# Altium PCB FE1.1S_PCB.PcbDoc
Units mil, origin at the board's own origin, x right, y up, seen from the top; angles counter-clockwise.
Board outline not stored, 4 copper layers (Top Layer, Internal Plane 1, Mid-Layer 1, Bottom Layer), stack 18.2 mil thick; 15 components, 0 nets, 58 pads, 24 vias.
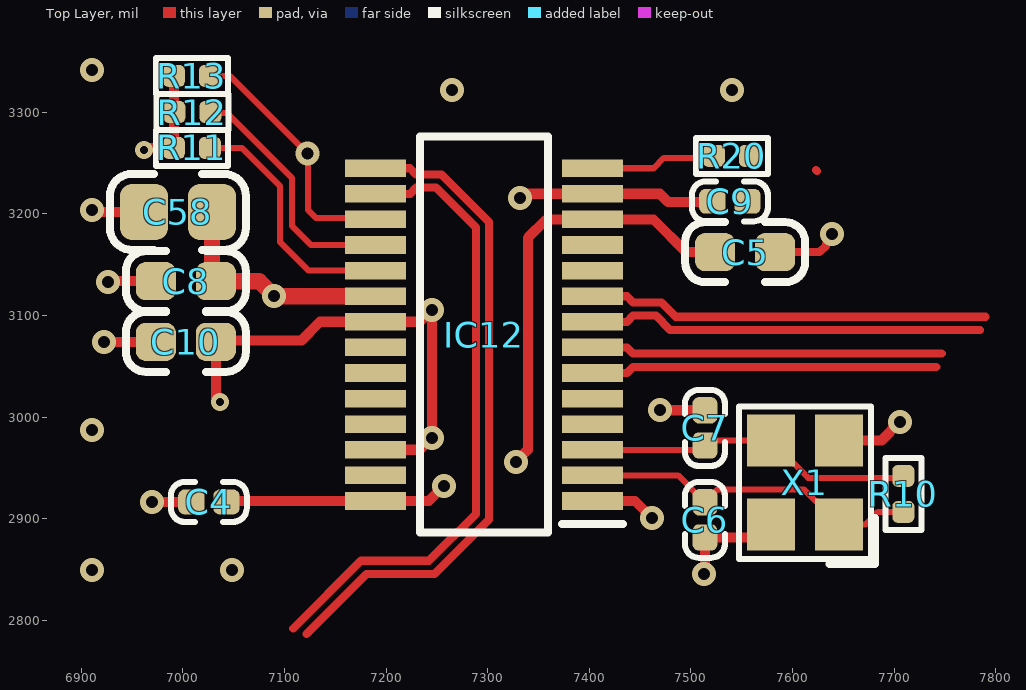
[diagram p0: Top Layer view]
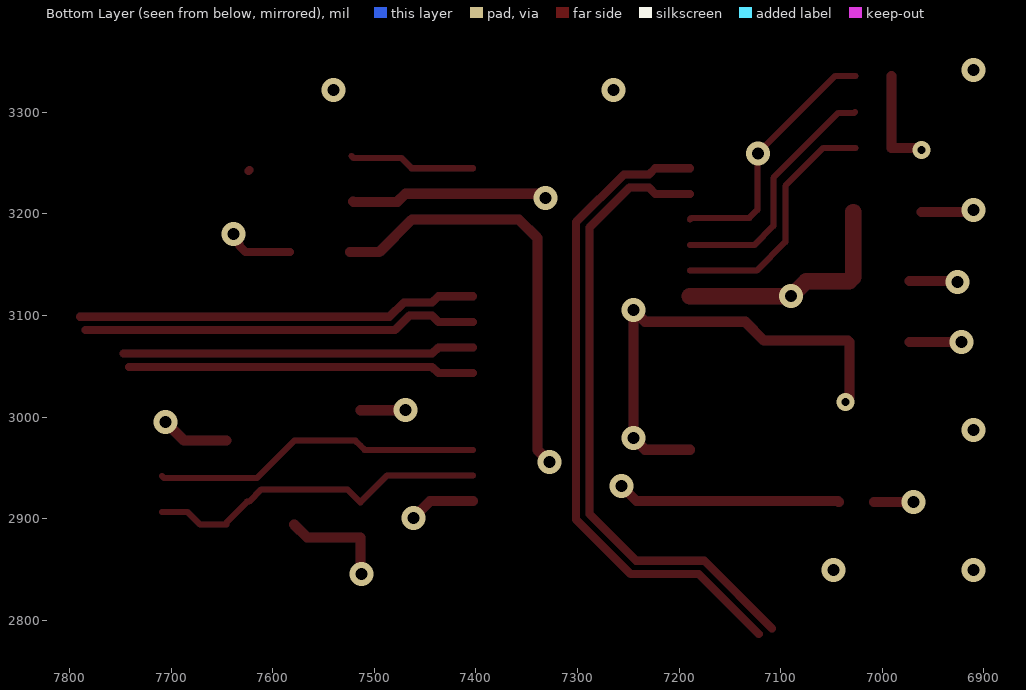
[diagram p1: Bottom Layer view, seen from below]
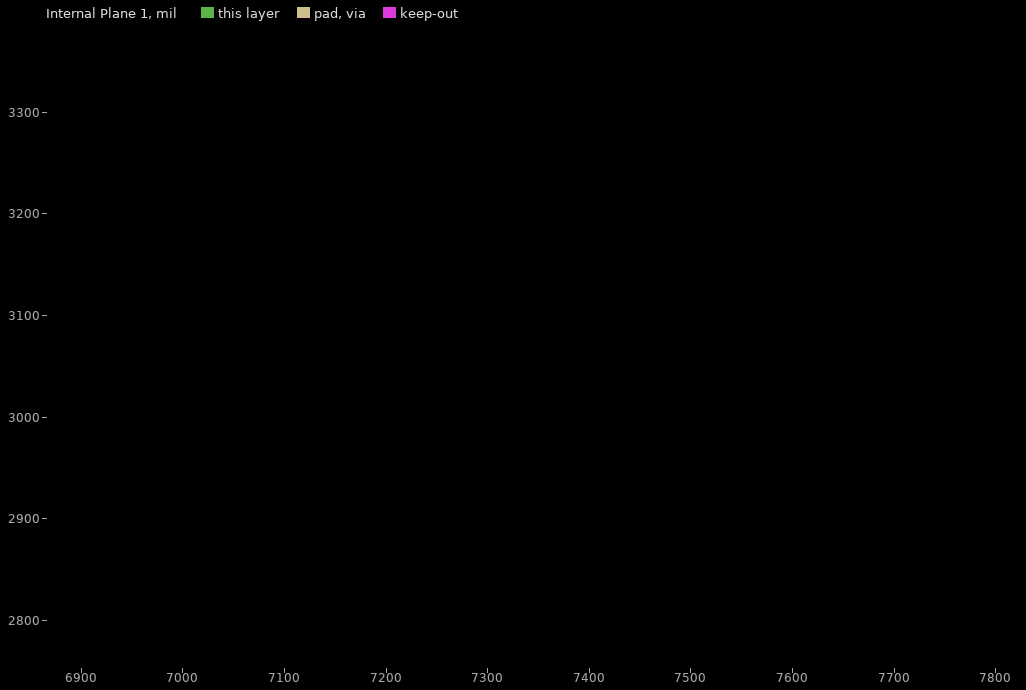
[diagram p2: Internal Plane 1, clearances drawn from the general rule]

## Layer stack, top to bottom
Top Solder: solder mask 0.4, Solder Resist, Dk 3.5
Top Layer: signal copper 1.4
Dielectric 1: dielectric 12.6, FR-4, Dk 4.8
Internal Plane 1: plane copper 1.4
Mid-Layer 1: signal copper 1.4
Bottom Layer: signal copper 1.4
Bottom Solder: solder mask 0.4, Solder Resist, Dk 3.5

## Components (designator, comment, footprint, x,y, rotation, side; value= is the part's Value field where it differs from the comment)
C4 "100nF" C_0402 7025.56,2916.53 r180 top
C5 "10uF" C_0603 7553.4,3162.36 r180 top
C6 "12pF" C_0402 7513.83,2898.85 r270 top
C7 "12pF" C_0402 7513.83,2989.37 r270 top
C8 "10uF" C_0603 7002.97,3133.83 r0 top
C9 "100nF" C_0402 7538.4,3212.36 r180 top
C10 "10uF" C_0603 7002.97,3074.02 r180 top
C58 "22uF" C_0805 6995.09,3201.97 r180 top
IC12 "FE1.1S" SOP64P600X175-28N 7296.27,3081.18 r180 top locked
R10 "1mΩ" R_0402 7709.09,2924.41 r270 top
R11 "10kΩ" R_0402 7008.87,3264.96 r180 top
R12 "10kΩ" R_0402 7009.33,3300.24 r180 top
R13 "10kΩ" R_0402 7008.87,3335.83 r180 top
R20 "2.7kΩ" R_0402 7540.37,3257.09 r180 top
X1 "12Mhz/20pF" XTAL_3225-4P 7612.29,2935.51 r90 top

## Footprints (in the part's own frame and the unit in brackets; to place one, negate y for a bottom-side part, rotate by r counter-clockwise, add the part's x,y. Pads: shape width x height; smd on the part's side, far side on the other; paste and mask are expansions set on the pad)
C_0402 [mm] "Chip Capacitor, 2-Leads, Body 1.00x0.50mm, IPC Medium Density"
  rrect50% 0.66x0.62 smd: 1(-0.44,0) 2(0.44,0)
  silkscreen extent -0.95,-0.5 0.95,0.5, body extent -0.52,-0.27 0.53,0.28, height 0.55
C_0603 [mm] "Chip Capacitor, 2-Leads, Body 1.60x0.80mm, IPC Medium Density"
  rrect50% 1x0.95 smd: 1(-0.75,0) 2(0.75,0)
  silkscreen extent -1.5,-0.75 1.5,0.75, body extent -0.8,-0.4 0.8,0.4, height 0.87
C_0805 [mm] "Chip Capacitor, 2-Leads, Body 2.00x1.25mm, IPC Medium Density"
  rrect50% 1.2x1.4 smd: 1(-0.85,0) 2(0.85,0)
  silkscreen extent -1.7,-0.95 1.7,0.95, body extent -1,-0.62 1,0.63, height 0.88
R_0402 [mm] "Chip Resistor, 2-Leads, Body 1.00x0.50mm, IPC Medium Density"
  rrect50% 0.55x0.55 smd: 1(-0.45,0) 2(0.45,0)
  silkscreen extent -0.9,-0.45 0.9,0.45, body extent -0.5,-0.27 0.5,0.28, height 0.4
SOP64P600X175-28N [mm]
  rect 1.525x0.44 smd: 1(-2.712,4.16) 2(-2.712,3.52) 3(-2.712,2.88) 4(-2.712,2.24) 5(-2.712,1.6) 6(-2.712,0.96) 7(-2.712,0.32) 8(-2.712,-0.32) 9(-2.712,-0.96) 10(-2.712,-1.6) 11(-2.712,-2.24) 12(-2.712,-2.88) 13(-2.712,-3.52) 14(-2.712,-4.16) 15(2.712,-4.16) 16(2.712,-3.52) 17(2.712,-2.88) 18(2.712,-2.24) 19(2.712,-1.6) 20(2.712,-0.96) 21(2.712,-0.32) 22(2.712,0.32) 23(2.712,0.96) 24(2.712,1.6) 25(2.712,2.24) 26(2.712,2.88) 27(2.712,3.52) 28(2.712,4.16)
  silkscreen extent -3.47,-4.95 1.6,4.95, body extent -3,-4.95 3,4.95, height 1.75
XTAL_3225-4P [mm]
  rect 1.3x1.2 smd: 1(-1.05,-0.85) 2(1.05,-0.85) 3(1.05,0.85) 4(-1.05,0.85)
  silkscreen extent -2.03,-1.75 1.91,1.65, body extent -1.47,-1.27 1.73,1.23, height 0.7

## Part data
C4 C5 C6 C7 C8 C9 C10 C58: library part Cap_Chip, "贴片电容"
IC12: "Integrated Circuit", Manufacturer_Name="JFD IC", Manufacturer_Part_Number=FE1.1S
R10 R11 R12 R13 R20: library part Res_Chip, "贴片电阻"
X1: library part Crystal_4P, "4脚无源晶振"

## Via types
v1: diameter 23.62, hole 11.81, Top Layer to Bottom Layer, tented both sides, 22 vias
v2: diameter 17.72, hole 7.87, Top Layer to Bottom Layer, tented both sides, 2 vias

## Nets (pads, with @x,y where several pads share a name; then routed paths per layer and width w, separated by ;. In a path a pad name is that pad's centre, name@x,y a point inside that pad or via, vN(x,y) a via of type N, cw(c..) or ccw(c..) an arc to the next point about the centre after c; other vN are vias at no path point)
pads on no net: C4.1 C4.2 C5.1 C5.2 C6.1 C6.2 C7.1 C7.2 C8.1 C8.2 C9.1 C9.2 C10.1 C10.2 C58.1 C58.2 IC12.1 IC12.2 IC12.3 IC12.4 IC12.5 IC12.6 IC12.7 IC12.8 IC12.9 IC12.10 IC12.11 IC12.12 IC12.13 IC12.14 IC12.15 IC12.16 IC12.17 IC12.18 IC12.19 IC12.20 IC12.21 IC12.22 IC12.23 IC12.24 IC12.25 IC12.26 IC12.27 IC12.28 R10.1 R10.2 R11.1 R11.2 R12.1 R12.2 R13.1 R13.2 R20.1 R20.2 X1.1 X1.2 X1.3 X1.4
copper on no net: | length 6482
  Top Layer w6: 7026.59,3264.96 7058.08,3264.96 7095.49,3227.56 7095.49,3172.44 7123.76,3144.17 7189.5,3144.17 ; 7026.59,3335.83 7046.27,3335.83 v1(7122.51,3259.59) 7123.05,3259.05 7123.05,3203.94 7130.92,3196.06 7188,3196.06 7189.5,3194.56 ; 7027.05,3300.24 7027.92,3299.37 7043.36,3299.37 7107.3,3235.43 7107.3,3188.19 7126.12,3169.37 7189.5,3169.37 ; 7403.05,2942.59 7487.41,2942.59 7513.83,2916.18 7513.89,2916.18 7526.55,2928.84 7611.28,2928.84 7623.36,2916.76 7625.13,2916.76 7645.76,2896.14 7645.76,2894.17 7671.55,2894.17 7684.07,2906.69 7709.09,2906.69 ; 7403.05,2967.79 7509.57,2967.79 7513.83,2972.04 7518.63,2976.85 7578.83,2976.85 7615.52,2940.16 7707.12,2940.16 7709.09,2942.12 ; 7403.05,3244.96 7463.28,3244.96 7473.44,3255.12 7520.68,3255.12 7522.65,3257.09
  Top Layer w8: 7108.67,2792 7175.34,2858.67 7242.34,2858.67 7288.4,2904.72 7288.4,3186.49 7249.03,3225.86 7229.62,3225.86 7223.52,3219.76 7189.5,3219.76 ; 7121.67,2786.61 7180.73,2845.67 7247.73,2845.67 7301.4,2899.34 7301.4,3191.87 7254.41,3238.86 7229.62,3238.86 7223.52,3244.96 7189.5,3244.96 ; 7403.05,3043.38 7437.06,3043.38 7443.16,3049.48 7741.55,3049.48 ; 7403.05,3068.58 7437.06,3068.58 7443.16,3062.48 7746.93,3062.48 ; 7403.05,3093.78 7437.06,3093.78 7443.16,3099.87 7465.56,3099.87 7479.61,3085.83 7784.46,3085.83 ; 7403.05,3118.97 7437.06,3118.97 7443.16,3112.87 7470.95,3112.87 7485,3098.83 7789.85,3098.83 ; 7582.93,3162.36 7626.75,3162.36 7632.91,3168.52 7632.91,3170.2 7638.79,3176.09 v1(7638.79,3180.31) ; 7623.05,3243.31 7624.03,3242.32
  Top Layer w10: v1(6910.45,3203.94) 6912.41,3201.97 6961.63,3201.97 ; v1(6922.26,3074.02) 6973.44,3074.02 ; v1(6926.19,3133.07) 6926.96,3133.83 6973.44,3133.83 ; v2(6961.63,3262.99) 6963.72,3262.99 6965.68,3264.96 6991.16,3264.96 6991.16,3300.24 6991.16,3335.83 ; v1(6969.5,2916.53) 7008.24,2916.53 ; v2(7036.43,3014.96) 7032.49,3018.9 7032.49,3074.02 7033.76,3075.28 7116.44,3075.28 7134.93,3093.78 7189.5,3093.78 7233.36,3093.78 v1(7245.09,3105.51) v1(7245.09,2979.53) 7233.36,2967.79 7189.5,2967.79 ; 7042.89,2916.53 7043.75,2917.4 7189.5,2917.4 7242.02,2917.4 v1(7256.9,2932.28) ; v1(7327.77,2955.9) 7339.58,2967.72 7339.58,3176.38 7357.77,3194.56 7403.05,3194.56 7463.13,3194.56 7495.33,3162.36 7523.87,3162.36 ; v1(7331.71,3215.75) 7335.72,3219.76 7403.05,3219.76 7469.43,3219.76 7477.38,3211.81 7520.53,3211.81 7521.08,3212.36 ; 7403.05,2917.4 7445.02,2917.4 v1(7461.63,2900.79) ; v1(7469.5,3007.09) 7469.9,3006.69 7513.83,3006.69 ; v1(7512.81,2845.67) 7513.83,2846.69 7513.83,2881.53 7566.19,2881.53 7578.83,2894.17 ; 7645.76,2976.85 7687.29,2976.85 v1(7705.72,2995.28)
  Top Layer w16: 7028.56,3201.97 7028.56,3137.77 7032.49,3133.83 7075.04,3133.83 v1(7089.9,3118.97) 7189.5,3118.97
  other v1: 6910.45,2849.61 7048.24,2849.61 6910.45,2987.4 7264.78,3322.05 7540.37,3322.05 6910.45,3341.73